# Altium PCB PCB1.PcbDoc
Units mm, origin at the board's own origin, x right, y up, seen from the top; angles counter-clockwise.
Board outline 20 x 45 mm, 2 copper layers (Top Layer, Bottom Layer), stack 1.57 mm thick; 16 components, 14 nets, 81 pads, 45 vias.
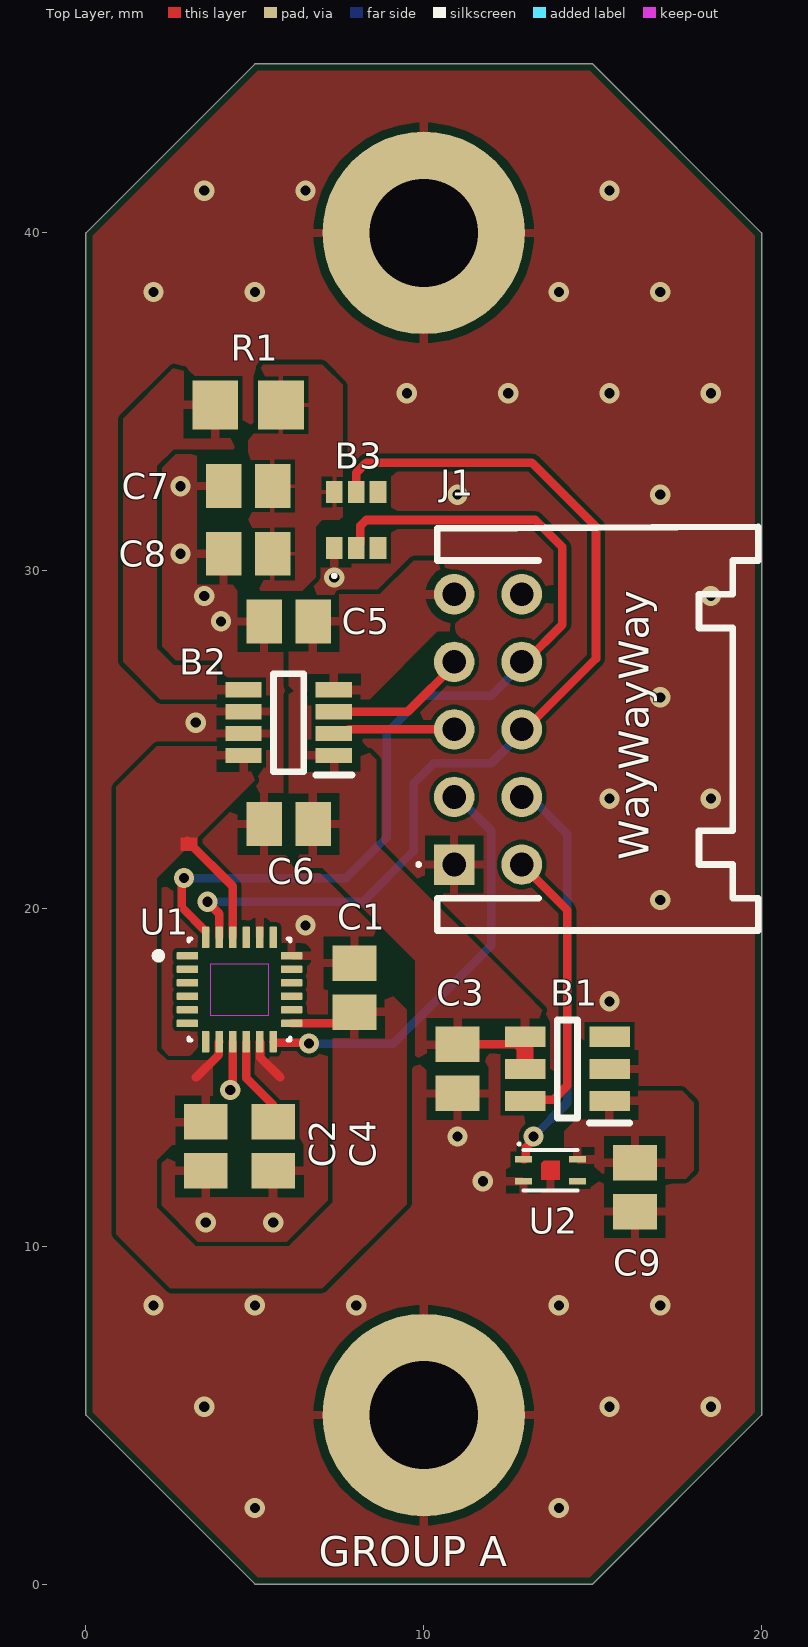
[diagram p0: Top Layer view]
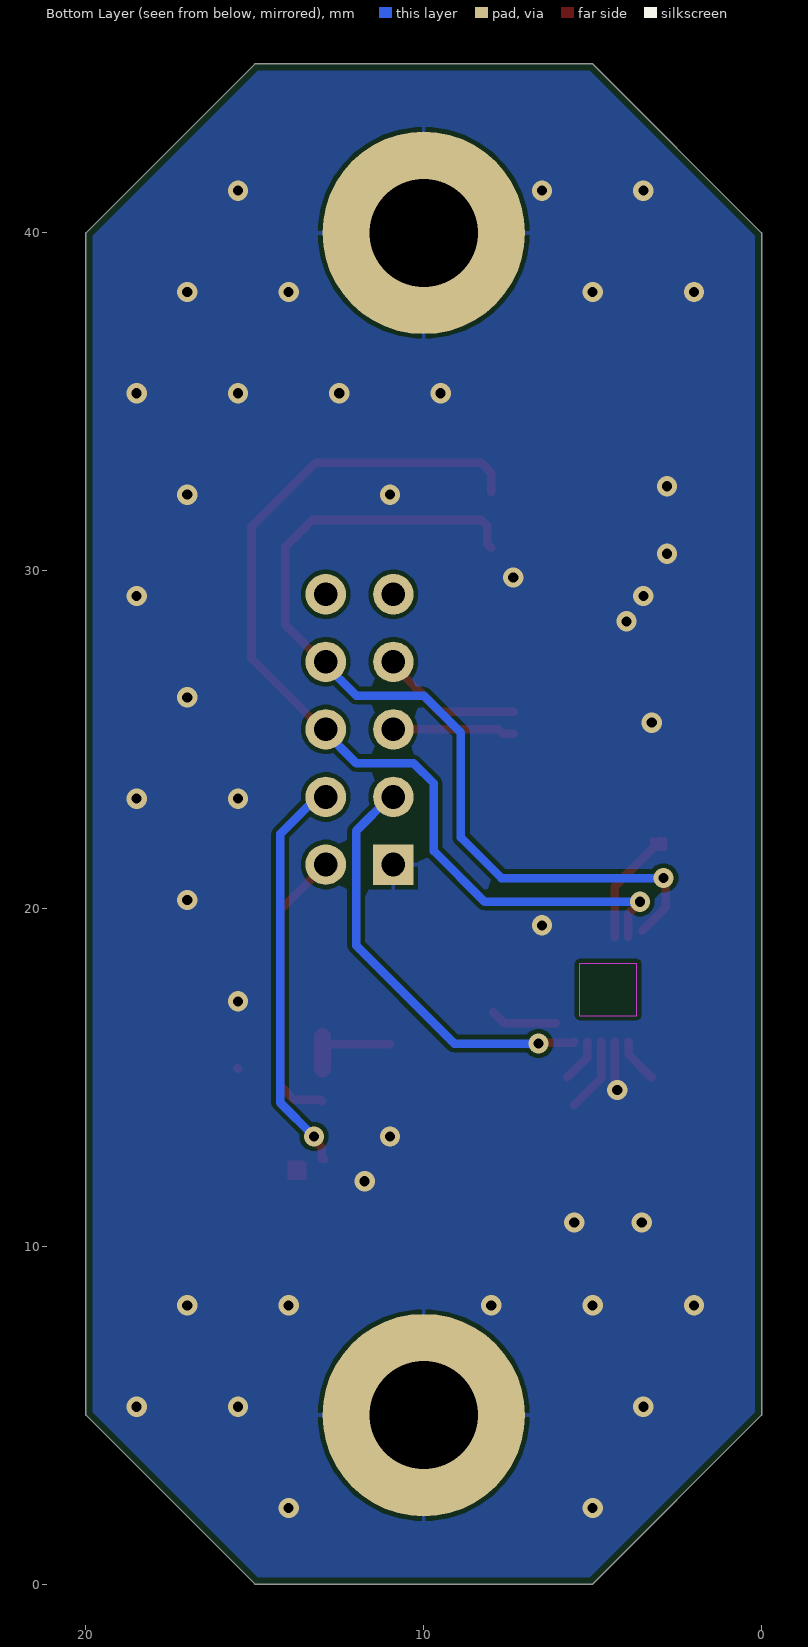
[diagram p1: Bottom Layer view, seen from below]
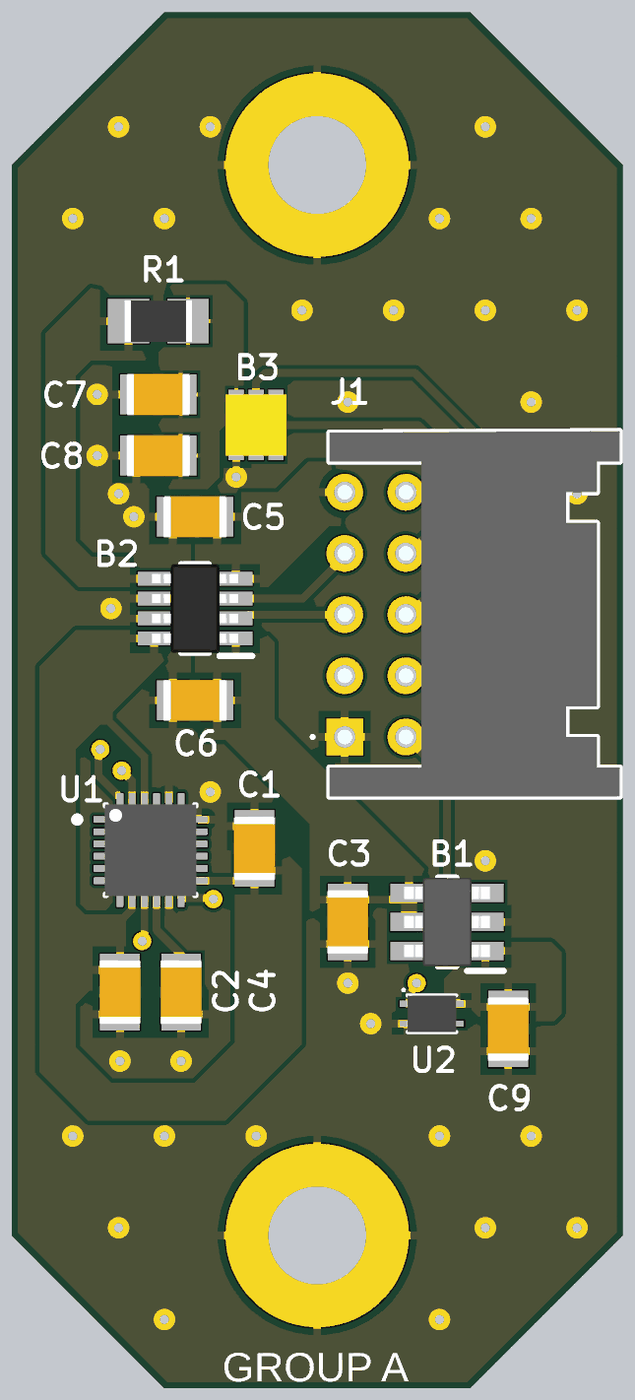
[diagram p2: 3D render of the assembled board from above, using the file's embedded part models]

## Layer stack, top to bottom
Top Solder: solder mask 0.0127, Solder Resist, Dk 3.8
Top Layer: signal copper 0.035
Dielectric: core 1.5, FR-4, Dk 4.5
Bottom Layer: signal copper 0.035
Bottom Solder: solder mask 0.0127, Solder Resist, Dk 3.8

## Board outline
5,0 0,5 0,40 5,45 15,45 20,40 20,5 15,0

## Design rules (kind name [scope] priority, off if disabled: settings)
BoardOutlineClearance [All] p1: gap=0.2 ignorepadtopadclearanceinfootprint=FALSE
Clearance [All] p1: gap=0.127 ignorepadtopadclearanceinfootprint=TRUE except(0.254: Arc-Hole Track-Hole SMDPad-Hole THPad-Hole Via-Hole Fill-Hole Poly-Hole Region-Hole Text-Hole)
ComponentClearance [All] p1: gap=0.127 collisioncheckmode=3 verticalgap=0.127 showdistances=TRUE
DiffPairsRouting [All] p1: maxlimit=0.254 minlimit=0.127 mostfreqgap=0.127 toplayer_minwidth=0.127 toplayer_maxwidth=25.4 toplayer_prefwidth=0.127 bottomlayer_minwidth=0.127 bottomlayer_maxwidth=25.4 bottomlayer_prefwidth=0.127 maxuncoupledlength=12.7
Height [All] p1: minheight=0 maxheight=1816.048 prefheight=12.7
HoleSize [All] p1: absolutevalues=TRUE maxlimit=6.3 minlimit=0.3 maxpercent=80.000 minpercent=20.000
HoleToHoleClearance [All] p1: gap=0.254 allowstackedmicrovias=FALSE
MinimumAnnularRing [All] p1: minimumring=0.152
MinimumSolderMaskSliver [All] p1: minsoldermaskwidth=0.152
PlaneClearance [All] p1: clearance=0.127
PlaneConnect PlaneConnectPowerPads [InPadClass('PowerPads')] p1: planeconnectstyle=Direct reliefexpansion=0.508 reliefentries=4 reliefconductorwidth=0.254 reliefairgap=0.254
PlaneConnect [All] p2: pad.planeconnectstyle=Relief pad.reliefexpansion=0.3 pad.reliefentries=4 pad.reliefconductorwidth=0.127 pad.reliefairgap=0.127 via.planeconnectstyle=Direct via.reliefexpansion=0.3 via.reliefentries=4 via.reliefconductorwidth=0.127 via.reliefairgap=0.127
PolygonConnect PolygonConnect_10 [All vs IsNamedPolygon('+1V8_L01_P009') Or IsNamedPolygon('+1V8_L01_P010') Or IsNamedPolygon('GND_L01_P015') Or IsNamedPolygon('GND_L01_P017') Or IsNamedPolygon('HALL_1V8_L01_P014') Or IsNamedPolygon('LDR_1V8_L01_P008') Or IsNamedPolygon('NETB2_6_L01_P007') Or IsNamedPolygon('Top Layer-IMU_1V8')] p1: thpad.connectstyle=Relief thpad.reliefconductorwidth=0.254 thpad.reliefentries=4 thpad.polygonreliefangle="90 Angle" thpad.airgapwidth=0.254 smdpad.connectstyle=Relief smdpad.reliefconductorwidth=0.254 smdpad.reliefentries=4 smdpad.polygonreliefangle="90 Angle" smdpad.airgapwidth=0.254 via.connectstyle=Direct via.reliefconductorwidth=0.254 via.reliefentries=4 via.polygonreliefangle="90 Angle" via.airgapwidth=0.254
PolygonConnect PolygonConnect_9 [All vs IsNamedPolygon('+1V8_L01_P009') Or IsNamedPolygon('+1V8_L01_P010') Or IsNamedPolygon('GND_L01_P015') Or IsNamedPolygon('GND_L01_P017') Or IsNamedPolygon('HALL_1V8_L01_P014') Or IsNamedPolygon('LDR_1V8_L01_P008') Or IsNamedPolygon('NETB2_6_L01_P007') Or IsNamedPolygon('Top Layer-IMU_1V8')] p2: connectstyle=Relief reliefconductorwidth=0.254 reliefentries=4 polygonreliefangle="90 Angle" airgapwidth=0.254
PolygonConnect PolygonConnect_8 [All vs IsNamedPolygon('+1V8_L01_P009') Or IsNamedPolygon('+1V8_L01_P010') Or IsNamedPolygon('GND_L01_P014') Or IsNamedPolygon('GND_L01_P015') Or IsNamedPolygon('LDR_1V8_L01_P008') Or IsNamedPolygon('NETB2_6_L01_P007') Or IsNamedPolygon('Top Layer-IMU_1V8') Or IsNamedPolygon('tga')] p3: thpad.connectstyle=Relief thpad.reliefconductorwidth=0.254 thpad.reliefentries=4 thpad.polygonreliefangle="90 Angle" thpad.airgapwidth=0.254 smdpad.connectstyle=Relief smdpad.reliefconductorwidth=0.254 smdpad.reliefentries=4 smdpad.polygonreliefangle="90 Angle" smdpad.airgapwidth=0.254 via.connectstyle=Direct via.reliefconductorwidth=0.254 via.reliefentries=4 via.polygonreliefangle="90 Angle" via.airgapwidth=0.254
PolygonConnect PolygonConnect_7 [All vs IsNamedPolygon('+1V8_L01_P009') Or IsNamedPolygon('+1V8_L01_P010') Or IsNamedPolygon('GND_L01_P014') Or IsNamedPolygon('GND_L01_P015') Or IsNamedPolygon('LDR_1V8_L01_P008') Or IsNamedPolygon('NETB2_6_L01_P007') Or IsNamedPolygon('Top Layer-IMU_1V8') Or IsNamedPolygon('tga')] p4: connectstyle=Relief reliefconductorwidth=0.254 reliefentries=4 polygonreliefangle="90 Angle" airgapwidth=0.254
PolygonConnect PolygonConnect_6 [All vs IsNamedPolygon('+1V8_L01_P009') Or IsNamedPolygon('+1V8_L01_P010') Or IsNamedPolygon('GND_L01_P014') Or IsNamedPolygon('GND_L01_P015') Or IsNamedPolygon('LDR_1V8_L01_P008') Or IsNamedPolygon('NETB2_6_L01_P007') Or IsNamedPolygon('Top Layer-IMU_1V8') Or IsNamedPolygon('tga')] p5: thpad.connectstyle=Relief thpad.reliefconductorwidth=0.254 thpad.reliefentries=4 thpad.polygonreliefangle="90 Angle" thpad.airgapwidth=0.254 smdpad.connectstyle=Relief smdpad.reliefconductorwidth=0.254 smdpad.reliefentries=2 smdpad.polygonreliefangle="90 Angle" smdpad.airgapwidth=0.254 via.connectstyle=Relief via.reliefconductorwidth=0.254 via.reliefentries=4 via.polygonreliefangle="90 Angle" via.airgapwidth=0.254
PolygonConnect PolygonConnect_5 [All vs IsNamedPolygon('+1V8_L01_P009') Or IsNamedPolygon('+1V8_L01_P010') Or IsNamedPolygon('GND_L01_P014') Or IsNamedPolygon('GND_L01_P015') Or IsNamedPolygon('LDR_1V8_L01_P008') Or IsNamedPolygon('NETB2_6_L01_P007') Or IsNamedPolygon('Top Layer-IMU_1V8') Or IsNamedPolygon('tga')] p6: thpad.connectstyle=Relief thpad.reliefconductorwidth=0.254 thpad.reliefentries=4 thpad.polygonreliefangle="90 Angle" thpad.airgapwidth=0.254 smdpad.connectstyle=Relief smdpad.reliefconductorwidth=0.254 smdpad.reliefentries=4 smdpad.polygonreliefangle="90 Angle" smdpad.airgapwidth=0.254 smdpad.conductorbypadedge=TRUE smdpad.mindistance=0.381 smdpad.enablemindistance=FALSE via.connectstyle=Relief via.reliefconductorwidth=0.254 via.reliefentries=4 via.polygonreliefangle="90 Angle" via.airgapwidth=0.254
PolygonConnect PolygonConnect_4 [All vs IsNamedPolygon('+1V8_L01_P009')] p7: connectstyle=Relief reliefconductorwidth=0.254 reliefentries=4 polygonreliefangle="90 Angle" airgapwidth=0.254
PolygonConnect PolygonConnect_3 [All vs IsNamedPolygon('GND_L01_P014')] p8: connectstyle=Relief reliefconductorwidth=0.254 reliefentries=4 polygonreliefangle="90 Angle" airgapwidth=0.254
PolygonConnect PolygonConnect_2 [All vs IsNamedPolygon('+1V8_L01_P009')] p9: connectstyle=Relief reliefconductorwidth=0.254 reliefentries=4 polygonreliefangle="90 Angle" airgapwidth=0.254
PolygonConnect PolygonConnect_1 [All vs IsNamedPolygon('+1V8_L01_P009')] p10: connectstyle=Relief reliefconductorwidth=0.254 reliefentries=4 polygonreliefangle="90 Angle" airgapwidth=0.254
PolygonConnect PolygonConnectPowerPads [All vs (InPadClass('PowerPads'))] p11: connectstyle=Direct reliefconductorwidth=0.254 reliefentries=4 polygonreliefangle="90 Angle" airgapwidth=0.254
PolygonConnect [All] p12: thpad.connectstyle=Relief thpad.reliefconductorwidth=0.127 thpad.reliefentries=4 thpad.polygonreliefangle="90 Angle" thpad.airgapwidth=0.127 smdpad.connectstyle=Relief smdpad.reliefconductorwidth=0.127 smdpad.reliefentries=4 smdpad.polygonreliefangle="90 Angle" smdpad.airgapwidth=0.127 via.connectstyle=Direct via.reliefconductorwidth=0.127 via.reliefentries=4 via.polygonreliefangle="90 Angle" via.airgapwidth=0.127
RoutingVias [All] p1: holewidth=0.3 width=0.6 viastyle="Through Hole" minholewidth=0.3 minwidth=0.6 maxholewidth=0.6 maxwidth=6.6
SilkToSilkClearance [All] p1: silktosilkclearance=0.127
SilkToSolderMaskClearance [IsPad] p1: minsilkscreentomaskgap=0.127 clearancetoexposedcopper=TRUE
SolderMaskExpansion [All] p1: expansion=0.051 istentingtop=FALSE
SupplyNets "Schematic Supply Nets_1" [InNet('GND')] p1: voltage=0.000
SupplyNets "Schematic Supply Nets" [InNet('+1V8')] p2: voltage=0.000
UnRoutedNet [All] p1: checkbadconnections=TRUE
Width Width_10mil [All] p1: maxlimit=25.4 minlimit=0.254 preferedwidth=0.254 minimp=50.000000 maximp=50.000000 favimp=50.000000
Width Width_6mil [All] p2: maxlimit=25.4 minlimit=0.152 preferedwidth=0.152 minimp=50.000000 maximp=50.000000 favimp=50.000000
Width Power_20mil [All] p3: maxlimit=25.4 minlimit=0.508 preferedwidth=0.508 minimp=50.000000 maximp=50.000000 favimp=50.000000
Width Power_12mil [All] p4: maxlimit=25.4 minlimit=0.305 preferedwidth=0.305 minimp=50.000000 maximp=50.000000 favimp=50.000000
Width Width_5mil [All] p5: maxlimit=25.4 minlimit=0.127 preferedwidth=0.127 minimp=50.000000 maximp=50.000000 favimp=50.000000
19 further rules are at their usual default settings.

## Components (designator, comment, footprint, x,y, rotation, side; value= is the part's Value field where it differs from the comment)
B1 "TPS22860DBVR" SOT95P280X145-6N 14.25,15.25 r180 top
B2 "TPS22960DCNR" SOP65P280X145-8N 6,25.5 r180 top
B3 "VEML6035" VEML6035 8,31.5 r270 top
C1 "Capacitor 100 nF +/-10% 50 V 0805" CAPC2013X95X50LL10T25 7.945,17.655 r90 top value=0.1µF
C2 "Capacitor 100 nF +/-10% 50 V 0805" CAPC2013X95X50LL10T25 3.545,12.955 r270 top value=0.1µF
C3 "Capacitor 100 nF +/-10% 50 V 0805" CAPC2013X95X50LL10T25 11,15.25 r270 top value=1µF
C4 "Capacitor 100 nF +/-10% 50 V 0805" CAPC2013X95X50LL10T25 5.545,12.955 r270 top value=0.1µF
C5 "Capacitor 100 nF +/-10% 50 V 0805" CAPC2013X95X50LL10T25 6,28.5 r180 top value=0.1µF
C6 "Capacitor 100 nF +/-10% 50 V 0805" CAPC2013X95X50LL10T25 6,22.5 r180 top value=0.1µF
C7 "Capacitor 100 nF +/-10% 50 V 0805" CAPC2013X95X50LL10T25 4.8,32.5 r180 top value=10nF
C8 "Capacitor 100 nF +/-10% 50 V 0805" CAPC2013X95X50LL10T25 4.8,30.5 r180 top value=0.1µF
C9 "Capacitor 100 nF +/-10% 50 V 0805" CAPC2013X95X50LL10T25 16.25,11.75 r270 top value=0.1µF
J1 "S10B-PHDSS__LF__SN_" S10BPHDSSLFSN 10.9,21.3 r270 top
R1 "Resistor 1k +/-1% 0805 125 mW" RESC2013X70X40ML20T20 4.8,34.9 r0 top value=10
U1 "ICM-20948" QFN40P300X300X105-24N 4.545,17.6 r0 top
U2 "MLX92216ELQ" DFN-4L 13.75,12.25 r0 top

## Footprints (in the part's own frame and the unit in brackets; to place one, negate y for a bottom-side part, rotate by r counter-clockwise, add the part's x,y. Pads: shape width x height; smd on the part's side, far side on the other; paste and mask are expansions set on the pad)
CAPC2013X95X50LL10T25 [mm] "Chip Capacitor, 2-Leads, Body 2.10x1.35mm, IPC High Density"
  rect 1.05x1.3 smd: 1(-0.725,0) 2(0.725,0)
  body extent -1.05,-0.67 1.05,0.67, height 0.95
DFN-4L [mm]
  rect 0.5x0.2 smd mask+0.051: 1(-0.8,0.325) 2(-0.8,-0.325) 3(0.8,-0.325) 4(0.8,0.325)
  round 0.025 smd mask+0.051: 5(0,0)
  Top Layer region: 0.275,-0.275 -0.275,-0.275 -0.275,0.2 -0.2,0.275 0.275,0.275
  silkscreen extent -0.95,-0.6 0.8,0.8, body extent -0.8,-0.6 0.8,0.6, height 0.35
QFN40P300X300X105-24N [mm]
  rrect25% 0.64x0.22 smd: 1(-1.545,1) 2(-1.545,0.6) 3(-1.545,0.2) 4(-1.545,-0.2) 5(-1.545,-0.6) 6(-1.545,-1) 13(1.545,-1) 14(1.545,-0.6) 15(1.545,-0.2) 16(1.545,0.2) 17(1.545,0.6) 18(1.545,1)
  rrect25% 0.22x0.64 smd: 7(-1,-1.545) 8(-0.6,-1.545) 9(-0.2,-1.545) 10(0.2,-1.545) 11(0.6,-1.545) 12(1,-1.545) 19(1,1.545) 20(0.6,1.545) 21(0.2,1.545) 22(-0.2,1.545) 23(-0.6,1.545) 24(-1,1.545)
  Keep-Out Layer region: 0.85,-0.77 -0.85,-0.77 -0.85,0.77 0.85,0.77
  silkscreen extent -2.5,-1.5 1.5,1.5, body extent -1.5,-1.5 1.5,1.5, height 1
RESC2013X70X40ML20T20 [mm] "Chip Resistor, 2-Leads, Body 2.2x1.35mm, IPC Low Density"
  rect 1.35x1.45 smd: 1(-0.975,0) 2(0.975,0)
  body extent -1.1,-0.67 1.1,0.67, height 0.7
S10BPHDSSLFSN [mm]
  rect 1.2x1.2 hole 0.7: 1(0,0)
  round 1.2 hole 0.7: 2(0,2) 3(-2,0) 4(-2,2) 5(-4,0) 6(-4,2) 7(-6,0) 8(-6,2) 9(-8,0) 10(-8,2)
  silkscreen extent -10,-1.1 1.95,9, body extent -10,-0.5 1.95,9, height 5.1
SOP65P280X145-8N [mm]
  rect 1.075x0.45 smd: 1(-1.338,0.975) 2(-1.338,0.325) 3(-1.338,-0.325) 4(-1.338,-0.975) 5(1.338,-0.975) 6(1.338,-0.325) 7(1.338,0.325) 8(1.338,0.975)
  silkscreen extent -1.88,-1.45 0.45,1.55, body extent -1.41,-1.45 1.41,1.45, height 1.3
SOT95P280X145-6N [mm]
  rect 1.2x0.6 smd: 1(-1.25,0.95) 2(-1.25,0) 3(-1.25,-0.95) 4(1.25,-0.95) 5(1.25,0) 6(1.25,0.95)
  silkscreen extent -1.85,-1.45 0.3,1.6, body extent -1.4,-1.45 1.4,1.45, height 1.18
VEML6035 [mm]
  rect 0.65x0.5 smd: 1(0.825,-0.65) 2(0.825,0) 3(0.825,0.65) 4(-0.825,0.65) 5(-0.825,0) 6(-0.825,-0.65)
  silkscreen extent 1.6,-0.7 1.7,-0.6, body extent -1,-1 1,1, height 0.37

## Part data
B1: "TPS22860 Ultra-low leakage load switch", Manufacturer_Name="Texas Instruments", Mouser Part Number=595-TPS22860DBVR, Datasheet Link=http://www.ti.com/lit/gpn/tps22860, Geometry.Height=1.45mm, Manufacturer_Part_Number=TPS22860DBVR, Mouser Price/Stock=https://www.mouser.co.uk/ProductDetail/Texas-Instruments/TPS22860DBVR?qs=UfUFg%2FkmHHGRbEQGMDY1iA%3D%3D
B2: "5.5-V, 0.5-A, 435m, 2-channel load switch with quick output discharge", Manufacturer_Name="Texas Instruments", Mouser Part Number=595-TPS22960DCNR, Datasheet Link=https://www.ti.com/lit/gpn/TPS22960, Geometry.Height=1.45mm, Manufacturer_Part_Number=TPS22960DCNR, Mouser Price/Stock=https://www.mouser.co.uk/ProductDetail/Texas-Instruments/TPS22960DCNR?qs=fvVej%2FMj3jfEFDwYBGYVGQ%3D%3D
B3: "VISHAY - VEML6035 - AMBIENT LIGHT PHOTO SENSOR, I2C, SMD-6", Manufacturer_Name=Vishay, Mouser Part Number=78-VEML6035, Datasheet Link=https://www.vishay.com/docs/84889/veml6035.pdf, Geometry.Height=0.5mm, Manufacturer_Part_Number=VEML6035, Mouser Price/Stock=https://www.mouser.co.uk/ProductDetail/Vishay-Semiconductors/VEML6035?qs=u16ybLDytRbGlqopHyj3nQ%3D%3D
C1 C2 C3 C4 C5 C6 C7 C8 C9: library part CMP-001-00018-6, "Chip Capacitor, 100 nF, +/- 10%, 50 V, 0805 (2012 Metric)", Capacitor Type=Ceramic, Case/Package=0805, Max Operating Temperature=125°C, Min Operating Temperature=-55°C, Tolerance=10%, Voltage Rating=50V, Mounting Technology=SM, Pins=2, RoHS Compliant=True
J1: "Connector Header Through Hole, Right Angle 10 position 0.079\" (2.00mm)", Manufacturer_Name="JST (JAPAN SOLDERLESS TERMINALS)", Manufacturer_Part_Number="S10B-PHDSS (LF)(SN)", Datasheet Link=https://www.jst-mfg.com/product/pdf/eng/ePHD.pdf, Geometry.Height=5mm
R1: library part CMP-009-00010-5, "Chip Resistor, 1 KOhm, +/- 1%, 0.125 W, -55 to 155 degC, 0805 (2013 Metric)", Case/Package=0805, Max Operating Temperature=155°C, Min Operating Temperature=-55°C, Power=125mW, Tolerance=1%, Voltage Rating=150V, Mounting Technology=SM, Pins=2, RoHS Compliant=True
U1: library part CMP-006-000000-1, "Accelerometer, Gyroscope, Magnetometer, 9 Axis Sensor I2C, SPI Output", Package="TFQFN-24 TDK InvenSense", Check_prices=https://www.snapeda.com/parts/ICM-20948/TDK/view-part/?ref=eda, Component Type=Standard, Design Item ID=ICM-20948, MF="TDK InvenSense", MP=ICM-20948, Pin Count=24, SnapEDA_Link=https://www.snapeda.com/parts/ICM-20948/TDK/view-part/?ref=snap, Source=ICM-20948.SchLib

## Free pads (board coordinates)
  round 6 hole 3.2: 2(10,5) 2(10,40)

## Via types
v1: diameter 0.6, hole 0.3, Top Layer to Bottom Layer, 45 vias

## Nets (pads, with @x,y where several pads share a name; then routed paths per layer and width w, separated by ;. In a path a pad name is that pad's centre, name@x,y a point inside that pad or via, vN(x,y) a via of type N, cw(c..) or ccw(c..) an arc to the next point about the centre after c; other vN are vias at no path point)
+1V8: B1.4 B1.5 B2.1 B2.4 C3.1 C5.1 C6.1 J1.9 | length 3.1
  Top Layer w0.254: C3.1 12.75,15.975 13,15.725
  Top Layer w0.508: B1.5 13,15.725 B1.4
GND: B1.2 B2.6 B2.7 B3.1 C1.2 C2.2 C3.2 C4.2 C5.2 C6.2 C7.2 C8.2 C9.2 J1.1 pad.2 U1.9 U1.11 U1.18 U1.20 U2.2 U2.5 | length 2.8
  Top Layer w0.254: v1(4.273,14.625) 4.273,14.718 4.345,14.79 U1.9 ; U1.11 5.162,16.038 5.162,15.588 5.75,15 ; B1.2 B1.2@15.525,15.275
  other v1: 5,2.25 14,2.25 3.5,5.25 15.5,5.25 18.5,5.25 2,8.25 5,8.25 8,8.25 14,8.25 17,8.25 3.545,10.7 5.545,10.7 11.75,11.925 11,13.25 15.5,17.25 6.5,19.5 17,20.25 15.5,23.25 18.5,23.25 3.25,25.5 17,26.25 4,28.5 3.5,29.25 18.5,29.25 7.35,29.8 2.8,30.5 11,32.25 17,32.25 2.8,32.5 9.5,35.25 12.5,35.25 15.5,35.25 18.5,35.25 2,38.25 5,38.25 14,38.25 17,38.25 3.5,41.25 6.5,41.25 15.5,41.25
HALL_1V8: B1.1 C9.1 U2.4
HALL_EN: B1.6 J1.2 | length 8.5
  Top Layer w0.254: J1.2 14.25,19.95 14.25,14.75 13.832,14.332 13.032,14.332 B1.6
HALL_OUT: J1.4 U2.1 | length 12
  Top Layer w0.254: U2.1 12.992,12.575 13.019,12.602 13.019,12.925 13.25,13.156 v1(13.25,13.25)
  Bottom Layer w0.254: J1.4 13.156,23.3 14.25,22.206 14.25,14.25 v1(13.25,13.25)
IMU_1V8: B2.8 C1.1 C2.1 U1.8 U1.13 U1.22 | length 6.8
  Top Layer w0.254: 3,22 4.345,20.655 U1.22 ; 3.25,15 3.263,15 3.928,15.665 3.928,16.038 U1.8 ; U1.13 7.615,16.6 C1.1
IMU_EN: B2.2 J1.5 | length 3.7
  Top Layer w0.254: B2.2 7.651,25.175 7.775,25.3 J1.5@11,25.3
IMU_INT: J1.3 U1.12 | length 12.5
  Top Layer w0.254: U1.12 5.545,16.044 5.562,16.027 6.573,16.027 v1(6.6,16)
  Bottom Layer w0.254: v1(6.6,16) 9.1,16 12,18.9 12,22.3 J1.3@11,23.3
LDR_1V8: B2.5 R1.1
LDR_EN: B2.3 J1.7 | length 4.3
  Top Layer w0.254: B2.3 9.525,25.825 J1.7@11,27.3
NetB3_6: B3.6 C7.1 C8.1 R1.2
NetC4_1: C4.1 U1.10 | length 2.2
  Top Layer w0.254: U1.10 4.745,14.98 C4.1@5.545,14.18
SCL: B3.5 J1.6 U1.23 | length 29.3
  Top Layer w0.254: v1(3.6,20.2) 3.6,20.191 3.945,19.846 U1.23 ; B3.5 8,32.9 8.3,33.2 13.2,33.2 15.1,31.3 15.1,27.4 J1.6@13,25.3
  Bottom Layer w0.254: v1(3.6,20.2) 8.2,20.2 9.7,21.7 9.7,23.7 10.3,24.3 12,24.3 J1.6@13,25.3
SDA: B3.2 J1.8 U1.24 | length 27.4
  Top Layer w0.254: v1(2.9,20.9) 2.839,20.839 2.839,20.027 U1.24@3.528,19.338 ; B3.2 8.123,30.798 8.123,31.323 8.3,31.5 13.3,31.5 14.1,30.7 14.1,28.4 J1.8@13,27.3
  Bottom Layer w0.254: v1(2.9,20.9) 7.7,20.9 8.9,22.1 8.9,25.2 10,26.3 12,26.3 J1.8@13,27.3
pads on no net: B1.3 B3.3 B3.4 J1.10 U1.1 U1.2 U1.3 U1.4 U1.5 U1.6 U1.7 U1.14 U1.15 U1.16 U1.17 U1.19 U1.21 U2.3

## Polygon pours and split planes (outlines as drawn)
HALL_1V8 on Top Layer "HALL_1V8_L01_P014" (solid, pour order 14): 14.9,14.6 14.9,14.15 14.152,13.402 14.152,12 17.75,12 18,12.25 18,14.25 17.65,14.6
GND on Top Layer "GND_L01_P015" (solid, pour order 15): 5,45 0,40 0,5 5,0 15,0 20,5 20,40 15,45 9.1,45
GND on Top Layer "GND_L01_P017" (solid, pour order 17): 5.562,15.5 5.25,15.812 5.25,16.25 5,16.25 5,15.5 5.75,14.75 6.25,14.25 6.25,13.5 2.2,13.5 2.1,13.6 2.1,11.15 3.25,10 6,10 7.25,11.25 7.25,14.75 6.5,15.5
IMU_1V8 on Top Layer "Top Layer-IMU_1V8" (solid, pour order 12): 2.1,12.55 2.55,13 4.25,13 4.25,14.25 3.75,14.25 3.75,15.25 4.1,15.6 4.1,16.4 3.8,16.4 3.8,15.6 3.7,15.5 2.4,15.5 2.1,15.8 2.1,20.9 5.2,24 5.2,24.7 5.1,24.8 2.1,24.8 0.9,23.6 0.9,15 0.9,10.35 2.5,8.75 7,8.75 9.5,11.25 9.5,17 9,17.5 7.3,17.5 7.3,11.3 6,10 3.25,10 2.1,11.15
+1V8 on Top Layer "+1V8_L01_P010" (solid, pour order 10): 14.25,16.25 13,17.5 8.6,21.9 8.6,24.4 8.2,24.8 6.674,24.8 6.674,26.2 6,26.6 6,21.5 6.3,21.2 7,21.2 9.75,18.45 9.75,15.5 10.75,14.5 14.25,14.5
+1V8 on Top Layer "+1V8_L01_P009" (solid, pour order 9): 6,26.6 6.4,26.2 8.4,26.2 10.4,28.2 11.7,28.2 12,28.5 12,30 11.7,30.3 9.7,30.3 8.7,29.3 6.3,29.3 6,29
LDR_1V8 on Top Layer "LDR_1V8_L01_P008" (solid, pour order 8): 4.8,35.8 4.5,36.1 2.7,36.1 1.1,34.5 1.1,27.3 2.2,26.2 5.2,26.2 5.2,26.9 4.9,27.2 2.6,27.2 2.1,27.7 2.1,33.1 2.6,33.6 4.534,33.6 4.8,33.866
NetB3_6 on Top Layer "NETB3_6_L01_P007" (solid, pour order 7): 4.8,29.6 5,29.4 6.4,29.4 6.8,29.8 6.8,31.3 7,31.5 7.4,31.5 7.5,31.5 7.6,31.6 7.6,31.7 7.6,35.5 7,36.1 5.1,36.1 4.8,35.8
GND on Bottom Layer "GND" (solid, pour order 1): 5,45 0,40 0,5 5,0 15,0 20,5 20,40 15,45 9.1,45

## Other copper
Top Layer:
  rectangle net IMU_1V8: 2.8,21.7 3.3,22.1

## Silkscreen, mask and mechanical layers (free items; w line width, h text height)
Top Overlay:
  text "WayWayWay" at 16.964,21.422 h1.52 r90
  text "GROUP A" at 6.892,0.231 h1.52
Mechanical 1:
  the board outline again, w0.254